# Altium PCB PCB1.PcbDoc
Units mil, origin at the board's own origin, x right, y up, seen from the top; angles counter-clockwise.
Board outline 5905.5 x 3609.65 mil, 2 copper layers (Top Layer, Bottom Layer); 40 components, 41 nets, 159 pads, 12 vias.
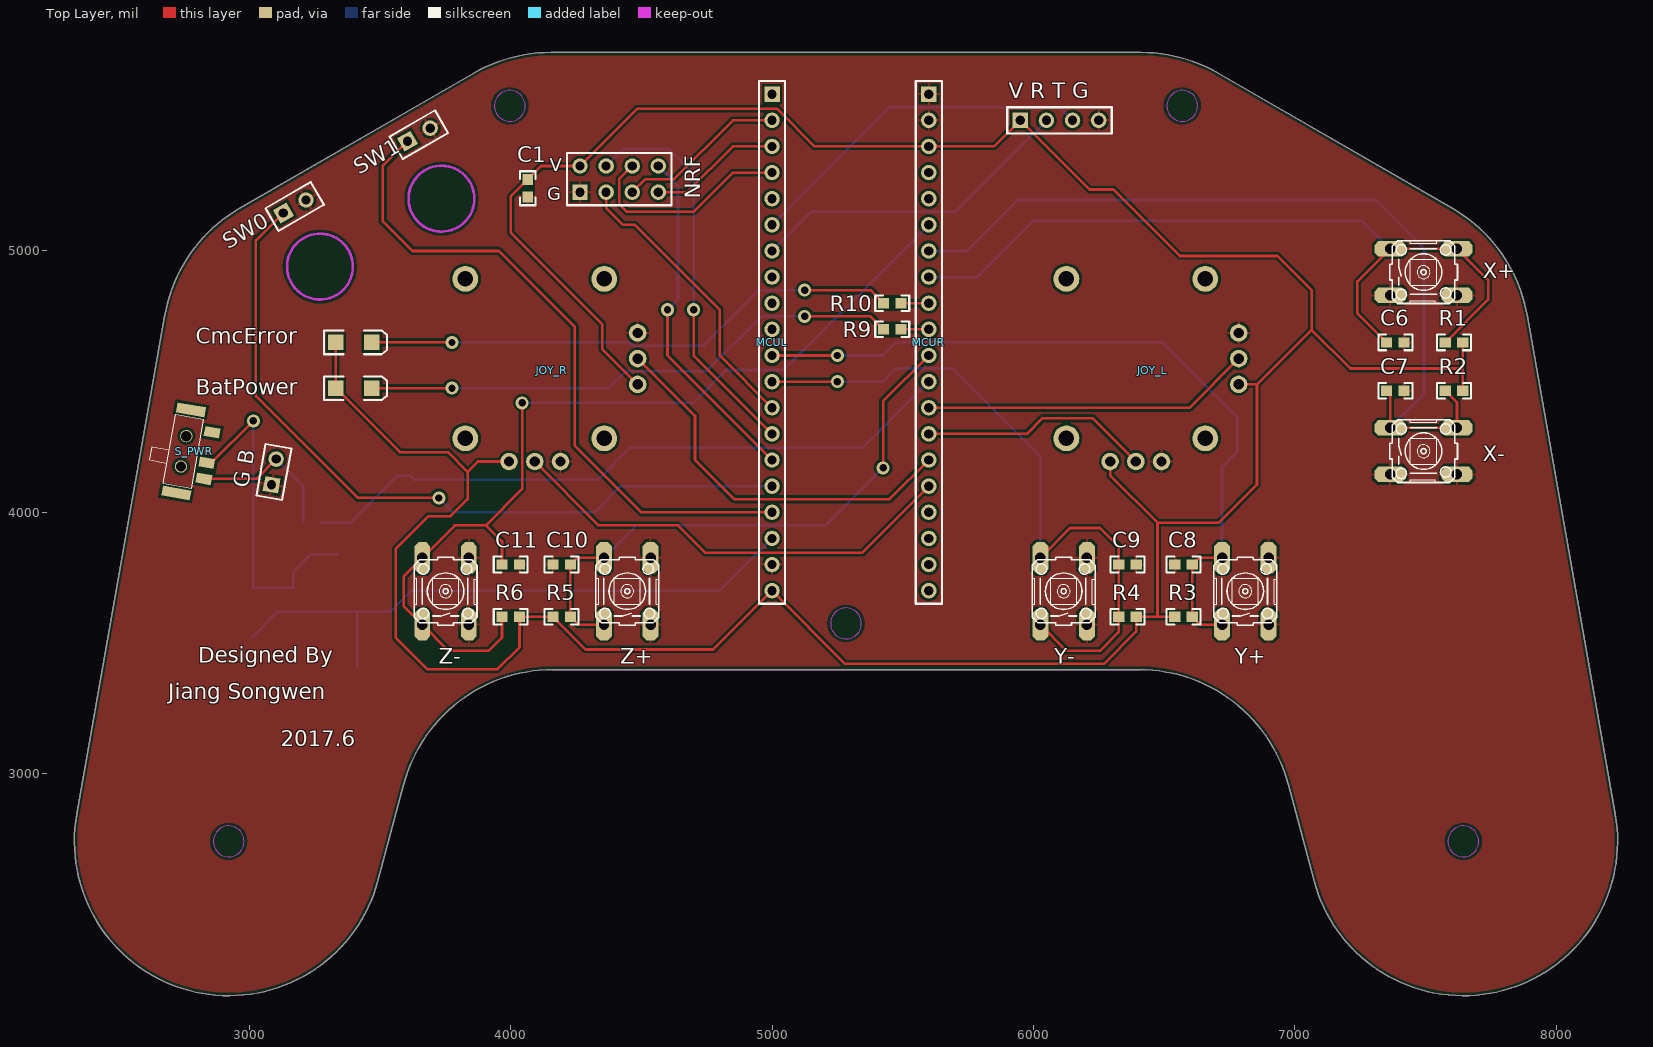
[diagram p0: Top Layer view]
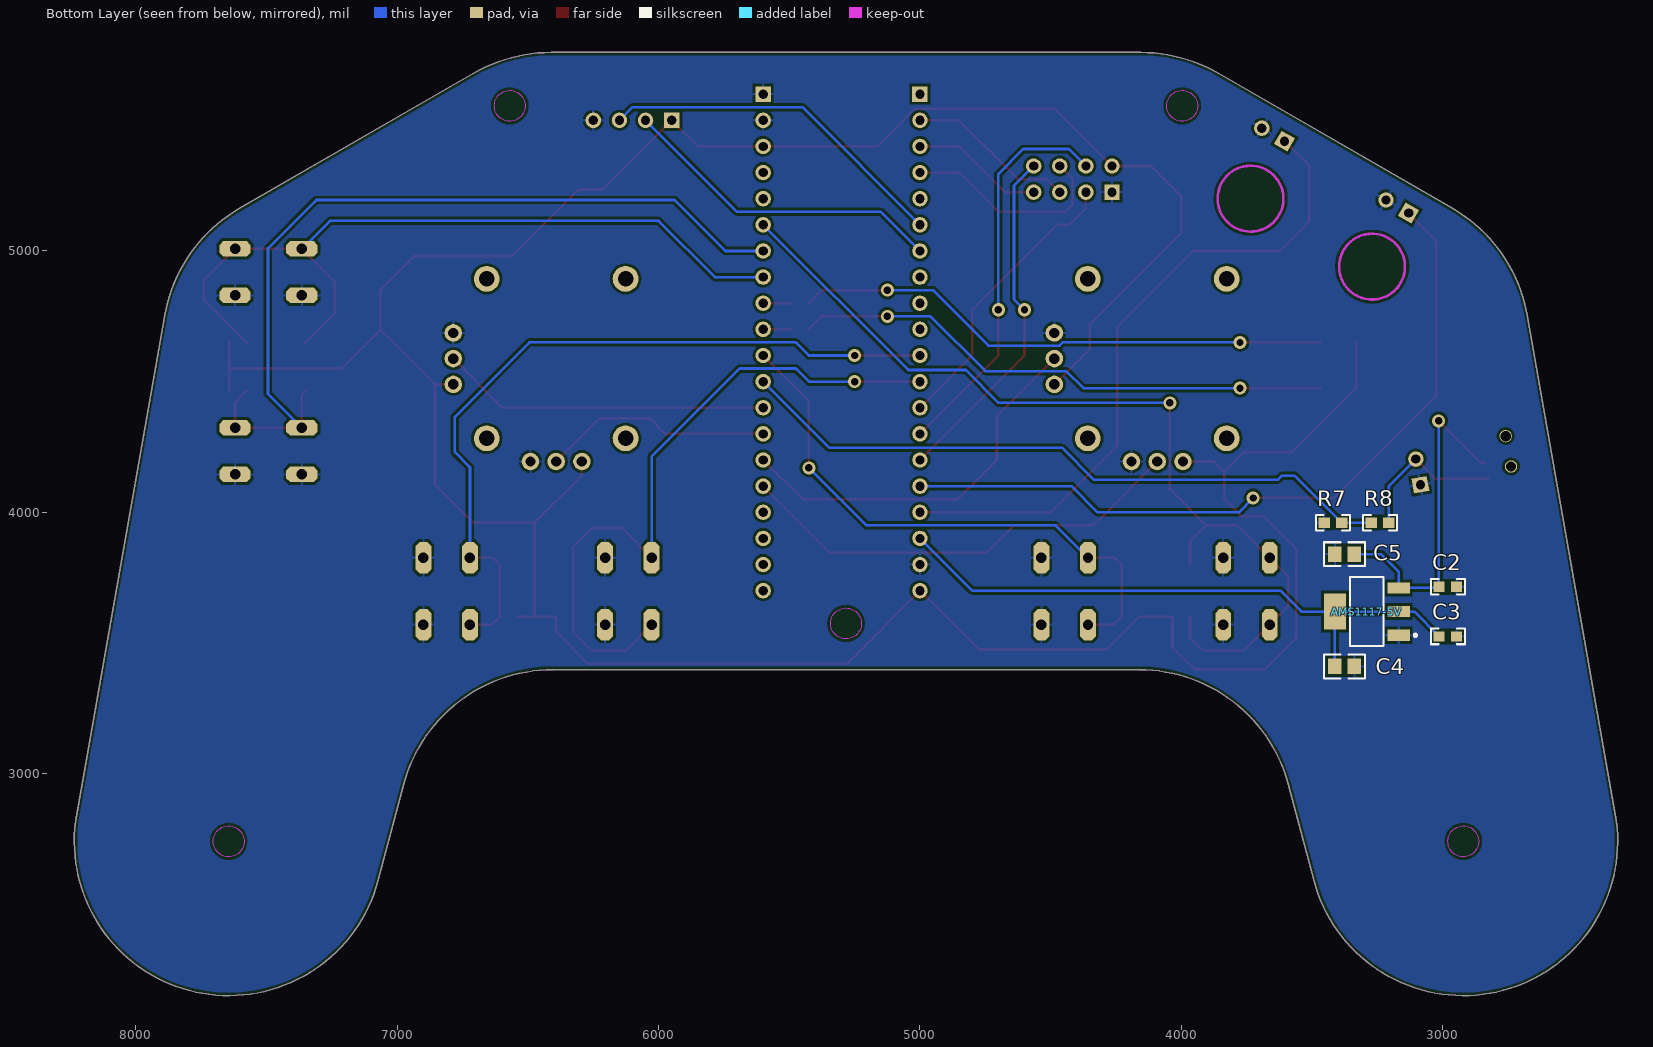
[diagram p1: Bottom Layer view, seen from below]

## Layer stack, top to bottom
Top Solder: solder mask 0.4, Solder Resist, Dk 3.5
Top Layer: signal copper 1.4
Dielectric 1: dielectric 12.6, FR-4, Dk 4.8
Bottom Layer: signal copper 1.4
Bottom Solder: solder mask 0.4, Solder Resist, Dk 3.5

## Board outline
2339.22,2843.35 ccw(c2920.8,2740.8) 3491.23,2587.96 3590.92,2960 cw(c4161.35,2807.16) 4161.35,3397.71 6404.66,3397.71 cw(c6404.66,2807.16) 6975.09,2960 7074.78,2587.96 ccw(c7645.21,2740.8) 8226.79,2843.35 7889.88,4754.06 ccw(c7308.3,4651.51) 7603.58,5162.95 6706.63,5680.8 ccw(c6411.36,5169.36) 6411.36,5759.91 4154.65,5759.91 ccw(c4154.65,5169.36) 3859.38,5680.8 2962.44,5162.95 ccw(c3257.71,4651.51) 2676.13,4754.06

## Design rules (kind name [scope] priority, off if disabled: settings)
Clearance [All] p1: gap=10
PolygonConnect [All] p1: connectstyle=Relief reliefconductorwidth=10 reliefentries=4 polygonreliefangle="90 Angle" airgapwidth=10
RoutingVias [All] p1: holewidth=28 width=50 viastyle="Through Hole" minholewidth=28 minwidth=50 maxholewidth=28 maxwidth=50
SolderMaskExpansion [All] p1: expansion=4
Width [All] p1: maxlimit=10 minlimit=10 preferedwidth=10
30 further rules are at their usual default settings.

## Components (designator, comment, footprint, x,y, rotation, side; value= is the part's Value field where it differs from the comment)
AMS1117-5V "AMS1117" SOT-223 3290,3620 r90 bottom
BatPower "LED2" 3.2X1.6X1.1 3400,4475 r0 top (schematic designator LED0)
C1 "cap smd" C1608[0603]N 4065,5240 r270 top
C2 "cap smd" C1608[0603]N 2980,3715 r180 bottom
C3 "cap smd" C1608[0603]N 2980,3525 r180 bottom
C4 "cap smd" C2012[0805]N 3375,3410 r180 bottom
C5 "cap smd" C2012[0805]N 3375,3840 r0 bottom
C6 "cap smd" C1608[0603]N 7385,4650 r0 top
C7 "cap smd" C1608[0603]N 7385,4465 r0 top
C8 "cap smd" C1608[0603]N 6575,3800 r180 top
C9 "cap smd" C1608[0603]N 6360,3800 r0 top
C10 "cap smd" C1608[0603]N 4195,3800 r180 top
C11 "cap smd" C1608[0603]N 4000,3800 r0 top
CmcError "LED2" 3.2X1.6X1.1 3400,4650 r0 top (schematic designator LED1)
"G B" "Header 2" HDR1X2 3085,4105 r80 top (schematic designator BATTERY)
JOY_L "JOYSTICK_2" JOYSTICK_2 5900,4460 r0 top
JOY_R "JOYSTICK_2" JOYSTICK_2 3600,4460 r0 top
MCUL "Header 20" HDR1X20 5000,5600 r270 top
MCUR "Header 20" HDR1X20 5600,5600 r270 top
NRF "Header 4X2" HDR2X4 4265,5225 r0 top
R1 "RES1" R1608[0603] 7610,4650 r0 top
R2 "RES1" R1608[0603] 7610,4465 r0 top
R3 "RES1" R1608[0603] 6575,3600 r180 top
R4 "RES1" R1608[0603] 6360,3600 r0 top
R5 "RES1" R1608[0603] 4195,3600 r180 top
R6 "RES1" R1608[0603] 4000,3600 r0 top
R7 "RES1" R1608[0603] 3420,3960 r180 bottom
R8 "RES1" R1608[0603] 3240,3960 r180 bottom
R9 "RES1" R1608[0603] 5460,4700 r180 top
R10 "RES1" R1608[0603] 5460,4800 r180 top
S_PWR "3脚拨动开关侧" 3脚拨动开关侧 2795,4225 r170 top
SW0 "Header 2" HDR1X2 3130,5145 r30 top
SW1 "Header 2" HDR1X2 3605,5420 r30 top
"V R T G" "Header 4" HDR1X4 5950,5500 r0 top (schematic designator UART1)
X+ "" SW 7495,4920 r0 top (schematic designator SX_P)
X- "" SW 7495,4235 r0 top (schematic designator SX_N)
Y+ "" SW 6810,3700 r90 top (schematic designator SY_P)
Y- "" SW 6115,3700 r90 top (schematic designator SY_N)
Z+ "" SW 4445,3700 r90 top (schematic designator SZ_P)
Z- "" SW 3750,3700 r90 top (schematic designator SZ_N)

## Footprints (in the part's own frame and the unit in brackets; to place one, negate y for a bottom-side part, rotate by r counter-clockwise, add the part's x,y. Pads: shape width x height; smd on the part's side, far side on the other; paste and mask are expansions set on the pad)
3.2X1.6X1.1 [mm] "SMT LED; 2 Flat Leads"
  rect 1.5x1.5 smd: 1(-1.75,0) 2(1.75,0)
  silkscreen extent -2.9,-1.15 3.2,1.15
3脚拨动开关侧 [mm] "side 3 pin switch 5X8mm"
  round 1.2 hole 1: 0(1.2,-1.5) 0(1.2,1.5)
  rect 2.8x1 smd: 0(1.2,-4.1) 0(1.2,4.1)
  rect 1.5x1 smd: 1(-1.2,2.3) 2(-1.2,0.7) 3(-1.2,-2.3)
  silkscreen extent -0.2,-3.4 4.3,3.4, body extent -0.2,-3.4 4.3,3.4, height 3.2
C1608[0603]N [mm] "Chip Capacitor; Body 1.6 x 0.8 mm (LxW typ)"
  rect 1.1x1 smd: 1(-0.85,0) 2(0.85,0)
  silkscreen extent -1.65,-0.76 1.65,0.76, body extent -0.8,-0.4 0.8,0.4, height 0.8
C2012[0805]N [mm]
  rect 1.3x1.5 smd: 1(-0.95,0) 2(0.95,0)
  silkscreen extent -2,-1.15 2,1.15, body extent -1,-0.6 1,0.6, height 1.2
HDR1X2 [mm] "Connector; Header; 2 Position"
  rect 1.5x1.5 hole 0.9: 1(0,0)
  round 1.5 hole 0.9: 2(2.54,0)
  silkscreen extent -1.27,-1.27 3.81,1.27
HDR1X4 [mm] "Connector; Header; 4 Position"
  rect 1.5x1.5 hole 0.9: 1(0,0)
  round 1.5 hole 0.9: 2(2.54,0) 3(5.08,0) 4(7.62,0)
  silkscreen extent -1.27,-1.27 8.89,1.27
HDR1X20 [mm] "Connector; Header; 20 Position"
  rect 1.5x1.5 hole 0.9: 1(0,0)
  round 1.5 hole 0.9: 2(2.54,0) 3(5.08,0) 4(7.62,0) 5(10.16,0) 6(12.7,0) 7(15.24,0) 8(17.78,0) 9(20.32,0) 10(22.86,0) 11(25.4,0) 12(27.94,0) 13(30.48,0) 14(33.02,0) 15(35.56,0) 16(38.1,0) 17(40.64,0) 18(43.18,0) 19(45.72,0) 20(48.26,0)
  silkscreen extent -1.27,-1.27 49.53,1.27
HDR2X4 [mm] "Connector; Header; 4x2 Position"
  rect 1.5x1.5 hole 0.9: 1(0,0)
  round 1.5 hole 0.9: 2(0,2.54) 3(2.54,0) 4(2.54,2.54) 5(5.08,0) 6(5.08,2.54) 7(7.62,0) 8(7.62,2.54)
  silkscreen extent -1.27,-1.27 8.89,3.81
JOYSTICK_2 [mm]
  round 1.7 hole 1: 1(15,-6.75) 1(22.5,5.75) 2(10,-6.75) 2(22.5,0.75) 3(12.5,-6.75) 4(22.5,3.25)
  round 2.5 hole 1.5: M1(5.75,11) M2(5.75,-4.5) M3(19.25,-4.5) M4(19.25,11)
R1608[0603] [mm] "Chip Capacitor; Body 1.6 x 0.8 mm (LxW typ)"
  rect 1.1x1 smd: 1(-0.85,0) 2(0.85,0)
  silkscreen extent -1.65,-0.76 1.65,0.76, body extent -0.8,-0.4 0.8,0.4, height 0.5
SOT-223 [mm] "SOT-223/SC-73; 4 Leads; Body 6.7 x 7.3 mm, inc. leads (LxW max)"
  rect 1.1x2.15 smd: 1(-2.3,-3.1) 2(0,-3.1) 3(2.3,-3.1)
  rect 3.5x2.15 smd: 2(0,3.1)
  silkscreen extent -3.35,-4.85 3.35,1.63, body extent -3.3,-3.2 3.3,3.1, height 1.7
SW [mil] "引脚间距6.5mmX4.5mm"
  oct 120x60 hole 40: 1(-130,88) 1(126,88) 2(-130,-90) 2(126,-90)
  silkscreen extent -132,-121 128,119

## Part data
AMS1117-5V: "2/4端口均输出3.3V"
BatPower CmcError: "Typical RED, GREEN, YELLOW, AMBER GaAs LED"
C1 C2 C3 C4 C5 C6 C7 C8 C9 C10 C11: library part CAP, "贴片无极性电容"
"G B" SW0 SW1: "Header, 2-Pin"
MCUL MCUR: "Header, 20-Pin"
NRF: "Header, 4-Pin, Dual row"
"V R T G": "Header, 4-Pin"
X+ X- Y+ Y- Z+ Z-: library part SW

## Via types
v1: diameter 50, hole 28, Top Layer to Bottom Layer, 12 vias

## Nets (pads, with @x,y where several pads share a name; then routed paths per layer and width w, separated by ;. In a path a pad name is that pad's centre, name@x,y a point inside that pad or via, vN(x,y) a via of type N, cw(c..) or ccw(c..) an arc to the next point about the centre after c; other vN are vias at no path point)
3V3: "V R T G.1" BatPower.1 C1.1 CmcError.1 JOY_L.2 JOY_R.2 MCUL.20 MCUR.3 NRF.2 R1.2 R2.2 R3.2 R4.2 R5.2 R6.2 | length 12667.4
  Top Layer w10: CmcError.1 BatPower.1 3576.1,4230 3760,4230 3835,4155 ; JOY_R.2@3993.7,4194.25 3874.25,4194.25 3835,4155 ; JOY_R.2@4485.83,4489.53 4350,4625.35 4350,4720 4000,5070 4000,5208.46 C1.1 4116.54,5325 NRF.2 4484.53,5544.53 5018.44,5544.53 5162.97,5400 MCUR.3 5850,5400 5950,5500 6215,5235 6306.3,5235 6560.47,4980.83 6934.17,4980.83 7065,4850 7065,4697.95 ; JOY_L.2@6293.7,4194.25 6293.7,4141.3 6475,3960 ; R3.2 6475,3600 ; JOY_L.2@6785.83,4489.53 6854.92,4489.53 6855.75,4488.7 ; R2.2 7643.46,4550 ; R1.2 7643.46,4550 ; 3835,4155 3835,4050 3770,3985 3685,3985 3560,3860 3560,3520 3680,3400 3950,3400 4033.46,3483.46 R6.2 R5.2 4286.54,3475 4775,3475 MCUL.20 5280,3420 6270,3420 6393.46,3543.46 R4.2 6475,3600 ; 6475,3600 6475,3960 ; 6475,3960 6710,3960 6855.75,4105.75 6855.75,4488.7 ; 6855.75,4488.7 7065,4697.95 ; 7065,4697.95 7212.95,4550 7643.46,4550
5V: AMS1117-5V.2 C3.1 C4.1 MCUL.18 | length 2352
  Bottom Layer w10: C3.1 3108.46,3620 3167.95,3620 AMS1117-5V.2@3412.05,3620 ; C4.1 3412.05,3410.35 AMS1117-5V.2@3412.05,3620 ; MCUL.18 4800,3700 3620,3700 3540,3620 AMS1117-5V.2@3412.05,3620
ADC0: JOY_R.3 MCUR.16 | length 1758.2
  Top Layer w10: JOY_R.3 4336.38,3950 4640,3950 4745,3845 5345,3845 MCUR.16
ADC1: JOY_R.4 MCUR.15 | length 1498
  Top Layer w10: JOY_R.4 4705,4368.78 4705,4200 4855,4050 5450,4050 MCUR.15
ADC2: JOY_L.3 MCUR.14 | length 885.6
  Top Layer w10: MCUR.14 5975,4300 6035,4360 6226.38,4360 JOY_L.3
ADC3: JOY_L.4 MCUR.13 | length 1263.7
  Top Layer w10: MCUR.13 6597.87,4400 JOY_L.4
ADC_BAT: MCUR.12 R7.2 R8.1 | length 2562.6
  Bottom Layer w10: R8.1 R7.2 3566.54,4140 3615,4140 3630,4125 4335,4125 4457.17,4247.17 5347.17,4247.17 MCUR.12
CE: MCUL.13 NRF.3 | length 1114.4
  Top Layer w10: NRF.3 4365,5165 4430,5100 4475,5100 4800,4775 4800,4600 MCUL.13
CSN: MCUL.14 NRF.4 | length 1520.5
  Top Layer w10: v1(4700,4775) 4700,4600 MCUL.14
  Bottom Layer w10: NRF.4 4430,5390 4605,5390 4700,5295 v1(4700,4775)
GND: "G B.1" "V R T G.4" AMS1117-5V.1 C1.2 C2.2 C3.2 C4.2 C5.2 C6.2 C7.2 C8.2 C9.2 C10.2 C11.2 JOY_L.1 JOY_R.1 MCUL.19 MCUR.1 MCUR.2 NRF.1 R7.1 SW0.2 SW1.2 X+.2 X-.2 Y+.2 Y-.2 Z+.2 Z-.2
IRQ: MCUL.15 NRF.8 | length 1338.3
  Top Layer w10: v1(4600,4775) 4600,4600 MCUL.15
  Bottom Layer w10: NRF.8 4640,5250 4640,4815 v1(4600,4775)
LED0: MCUR.10 R9.1 | length 106.5
  Top Layer w10: R9.1 MCUR.10
LED1: MCUR.9 R10.1 | length 106.5
  Top Layer w10: R10.1 MCUR.9
MISO: MCUL.3 NRF.7 | length 507.5
  Top Layer w10: NRF.7 4675,5225 4850,5400 MCUL.3
MOSI: MCUL.4 NRF.6 | length 825.3
  Top Layer w10: NRF.6 4415,5275 4415,5180 4445,5150 4700,5150 4850,5300 MCUL.4
NetAMS1117-5V_3: AMS1117-5V.3 C2.1 C5.1 S_PWR.2 | length 1296.5
  Top Layer w10: S_PWR.2 2854.66,4189.66 v1(3015,4350)
  Bottom Layer w10: v1(3015,4350) 3015,3716.54 C2.1 3017.91,3710.55 AMS1117-5V.3 3167.95,3772.95 3235,3840 C5.1
NetBATTERY_2: "G B.2" R8.2 S_PWR.1 | length 594.6
  Top Layer w10: S_PWR.1 3026.5,4127.62 3102.36,4203.48
  Bottom Layer w10: 3102.36,4203.48 3206.54,4099.31 R8.2
NetLED0_2: BatPower.2 R9.2 | length 2092
  Top Layer w10: BatPower.2 v1(3775,4475) ; v1(5125,4750) 5376.54,4750 R9.2
  Bottom Layer w10: v1(3775,4475) 4375,4475 4439.49,4539.49 4750,4539.49 ; 4750,4540 4960,4750 v1(5125,4750)
NetLED1_2: CmcError.2 R10.2 | length 2071.2
  Top Layer w10: CmcError.2 v1(3775,4650) ; v1(5125,4850) 5376.54,4850 R10.2
  Bottom Layer w10: v1(3775,4650) 4453.67,4650 4465.75,4637.91 4737.91,4637.91 4950,4850 v1(5125,4850)
PA5: C10.1 MCUR.11 R5.1 Z+.1 | length 2193.2
  Top Layer w10: Z+.1@4357,3570 4258.46,3570 R5.1 C10.1 4254.46,3826 Z+.1@4357,3826 ; v1(5425,4170) 5425,4425 MCUR.11
  Bottom Layer w10: Z+.1@4357,3826 4481,3950 5205,3950 v1(5425,4170)
PA8: MCUL.5
PA9: "V R T G.3" MCUL.6 | length 1357.1
  Bottom Layer w10: MCUL.6 5450,5550 5470,5550 6100,5550 6150,5500
PA10: "V R T G.2" MCUL.7 | length 1257.1
  Bottom Layer w10: MCUL.7 5150,5150 5700,5150 6050,5500
PA11: MCUL.8
PA12: MCUL.9
PA15: MCUL.10
PB0: C6.1 MCUR.8 R1.1 X+.1 | length 3085.4
  Top Layer w10: C6.1 7240,4761.54 7240,4883 7365,5008 7621,5008 7740,4889 7740,4813.46 R1.1
  Bottom Layer w10: MCUR.8 5785,4900 6000,5115 7258,5115 X+.1@7365,5008
PB1: C7.1 MCUR.7 R2.1 X-.1 | length 3357.2
  Top Layer w10: C7.1 7365,4451.54 7365,4323 7621,4323 7621,4420.54 R2.1
  Bottom Layer w10: MCUR.7 5745,5000 5940,5195 7310,5195 7495,5010 7495,4453 X-.1@7365,4323
PB3: C8.1 MCUL.11 R3.1 Y+.1 | length 2927.1
  Top Layer w10: MCUL.11 v1(5250,4600) ; R3.1 6638.46,3570 Y+.1@6722,3570 ; R3.1@6608.46,3605 C8.1 6634.46,3826 Y+.1@6722,3826
  Bottom Layer w10: v1(5250,4600) 5425,4600 5475,4650 6175,4650 6495,4650 6780,4365 6780,4230 6722,4172 Y+.1@6722,3826
PB4: C9.1 MCUL.12 R4.1 Y-.1 | length 2648.2
  Top Layer w10: MCUL.12 v1(5250,4500) ; Y-.1@6027,3570 6127,3470 6255,3470 6326.54,3541.54 R4.1 C9.1 6326.54,3868.46 6255,3940 6141,3940 Y-.1@6027,3826
  Bottom Layer w10: v1(5250,4500) 5425,4500 5475,4550 5690,4550 6027,4213 Y-.1@6027,3826
PB8: MCUL.16 SW0.1 | length 2944.2
  Top Layer w10: SW0.1 3025,5040 3025,4445 3415,4055 v1(3725,4055)
  Bottom Layer w10: v1(3725,4055) 3780,4000 4320,4000 4420,4100 MCUL.16
PB9: MCUL.17 SW1.1 | length 2562.7
  Top Layer w10: SW1.1 3510,5325 3510,5115 3625,5000 3955,5000 4245,4710 4245,4255 4500,4000 MCUL.17
PB10: C11.1 MCUR.6 R6.1 Z-.1 | length 3595.9
  Top Layer w10: R6.1 3966.54,3521.54 3915,3470 3762,3470 3662,3570 3590,3642 3590,3754 3662,3826 3786,3950 3905,3950 ; C11.1 3966.54,3888.46 3905,3950 ; v1(4043.66,4418.66) 4043.66,4088.66 3905,3950
  Bottom Layer w10: v1(4043.66,4418.66) 4698.66,4418.66 4824.53,4544.53 5044.53,4544.53 MCUR.6
PB11: MCUR.5
PB12: MCUL.1
PB13: MCUL.2 NRF.5 | length 648.9
  Top Layer w10: NRF.5 4515,5275 4625,5275 4850,5500 MCUL.2
PC13: MCUR.19
PC14: MCUR.18
PC15: MCUR.17
RST: MCUR.4
VB: MCUR.20
pads on no net: JOY_L.M1 JOY_L.M2 JOY_L.M3 JOY_L.M4 JOY_R.M1 JOY_R.M2 JOY_R.M3 JOY_R.M4 S_PWR.0 S_PWR.3

## Polygon pours and split planes (outlines as drawn)
GND on Top Layer "GND_L01_P008" (solid, remove dead copper, pour order 8): 2110,6505 2115,6510 8505,6510 8560,1940 8560,1805 8275,1805 1840,1880
GND on Bottom Layer "GND_L02_P010" (solid, remove dead copper, pour order 10): 2505,6015 8245,6015 8390,5870 8525,5735 8525,1790 2330,1790 1920,2200

## Keep-outs
Keep-Out Layer:
  circle w10: c3735,5200 r125.98
  circle w10: c3270,4940 r125.98
  circle w3.94: c6569.6,5555.34 r59.06
  circle w3.94: c5283.01,3574.87 r59.06
  circle w3.94: c3996.42,5555.34 r59.06
  circle w3.94: c2920.8,2740.8 r59.06
  circle w3.94: c7645.21,2740.8 r59.06
  lines w3.94: 2339.22,2843.35 ccw(c2920.8,2740.8) 3491.23,2587.96 3590.92,2960 cw(c4161.35,2807.16) 4161.35,3397.71 6404.66,3397.71 cw(c6404.66,2807.16) 6975.09,2960 7074.78,2587.96 ccw(c7645.21,2740.8) 8226.79,2843.35 7889.88,4754.06 ccw(c7308.3,4651.51) 7603.58,5162.95 6706.63,5680.8 ccw(c6411.36,5169.36) 6411.36,5759.91 4154.65,5759.91 ccw(c4154.65,5169.36) 3859.38,5680.8 2962.44,5162.95 ccw(c3257.71,4651.51) 2676.13,4754.06 2339.22,2843.35

## Silkscreen, mask and mechanical layers (free items; w line width, h text height)
Top Overlay:
  text "Designed By" at 2805,3425 h60
  text "Jiang Songwen" at 2690,3285 h60
  text "2017.6" at 3120,3105 h60

## Text inside footprints (layer, text, board x,y; h text height)
NRF: Top Overlay "V" at 4150,5305 h50; Top Overlay "G" at 4140,5195 h50